# Altium PCB Для Сережи(autoroute.PcbDoc (part 1 of 2)
Units mm, origin at the board's own origin, x right, y up, seen from the top; angles counter-clockwise.
Board outline 53 x 45 mm, 4 copper layers (Top Layer, Layer 1, Layer 2, Bottom Layer), stack 1.083 mm thick; 122 components, 141 nets, 830 pads, 246 vias.
Unrouted connection lines stored in the file: 174.
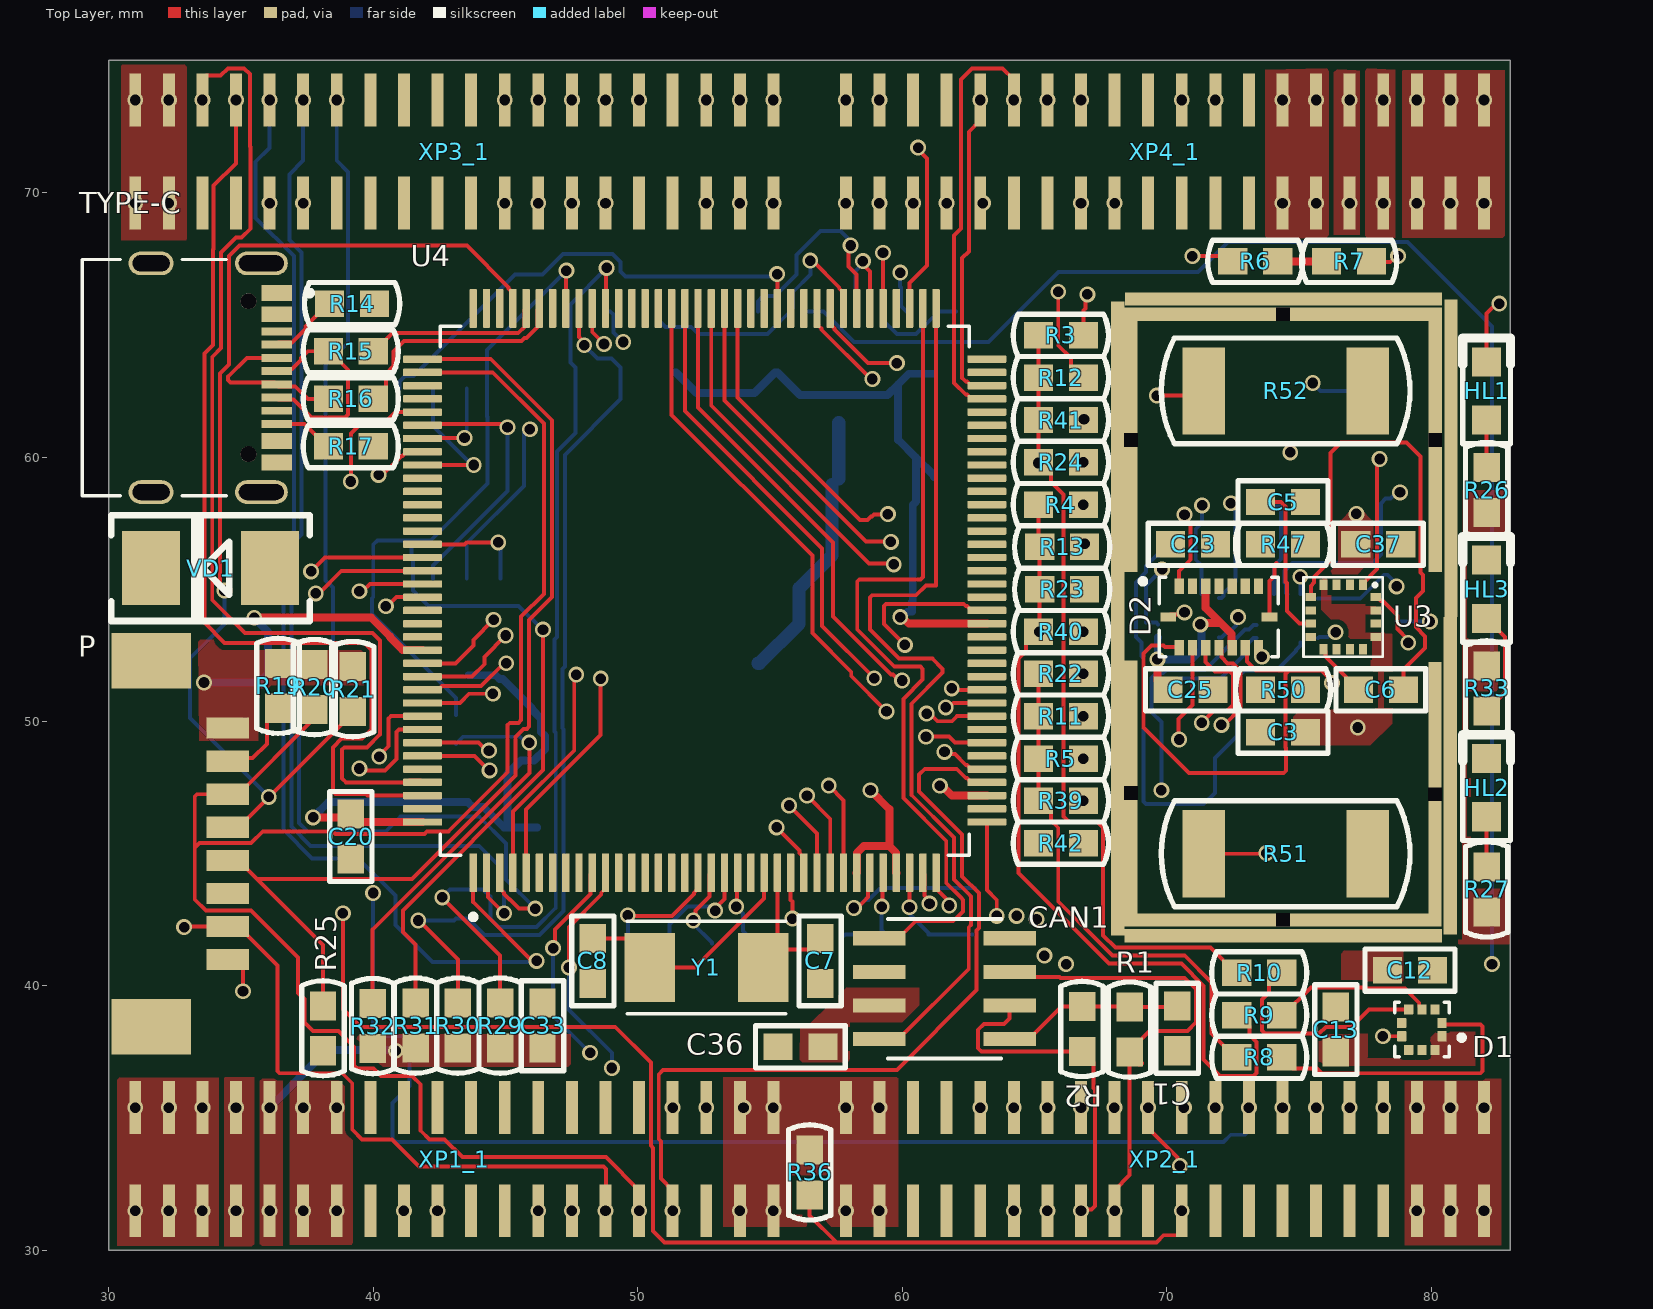
[diagram p0: Top Layer view]
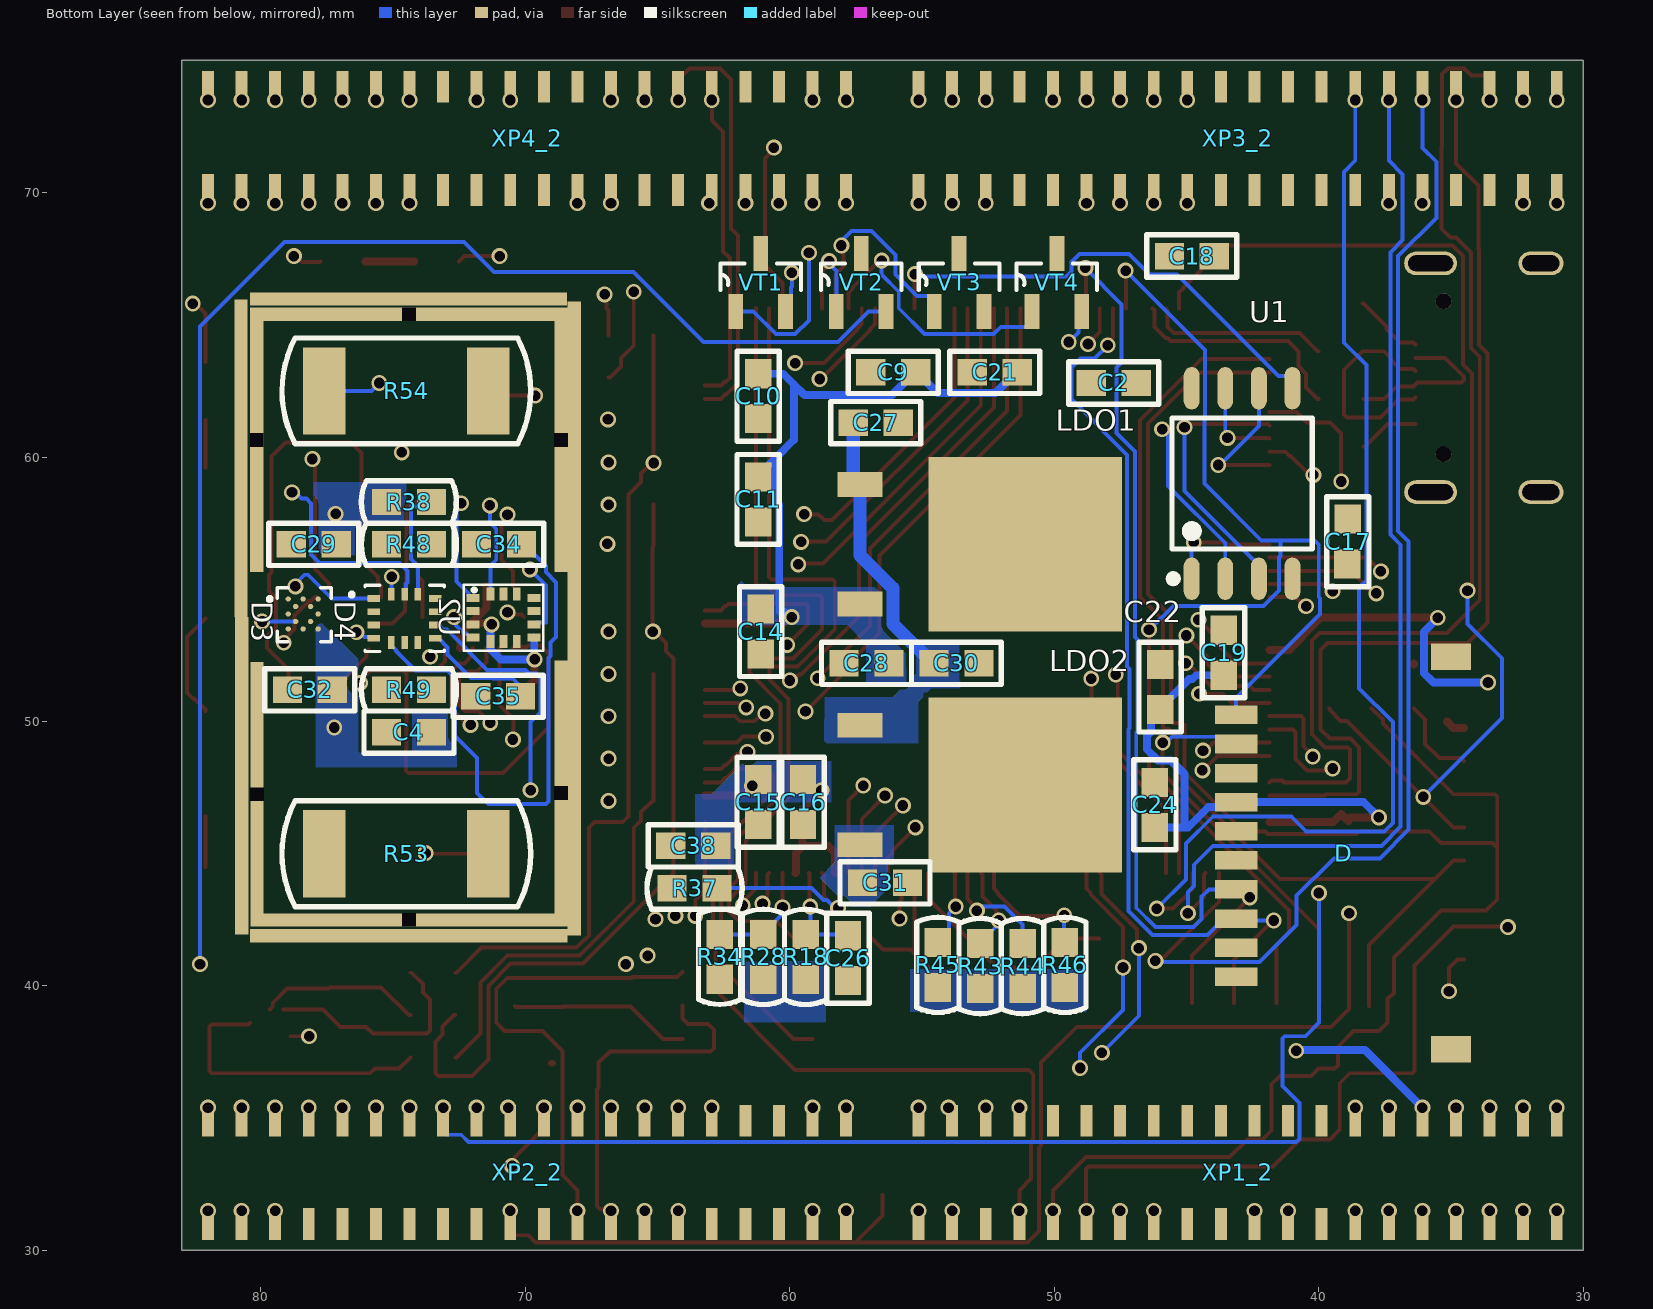
[diagram p1: Bottom Layer view, seen from below]
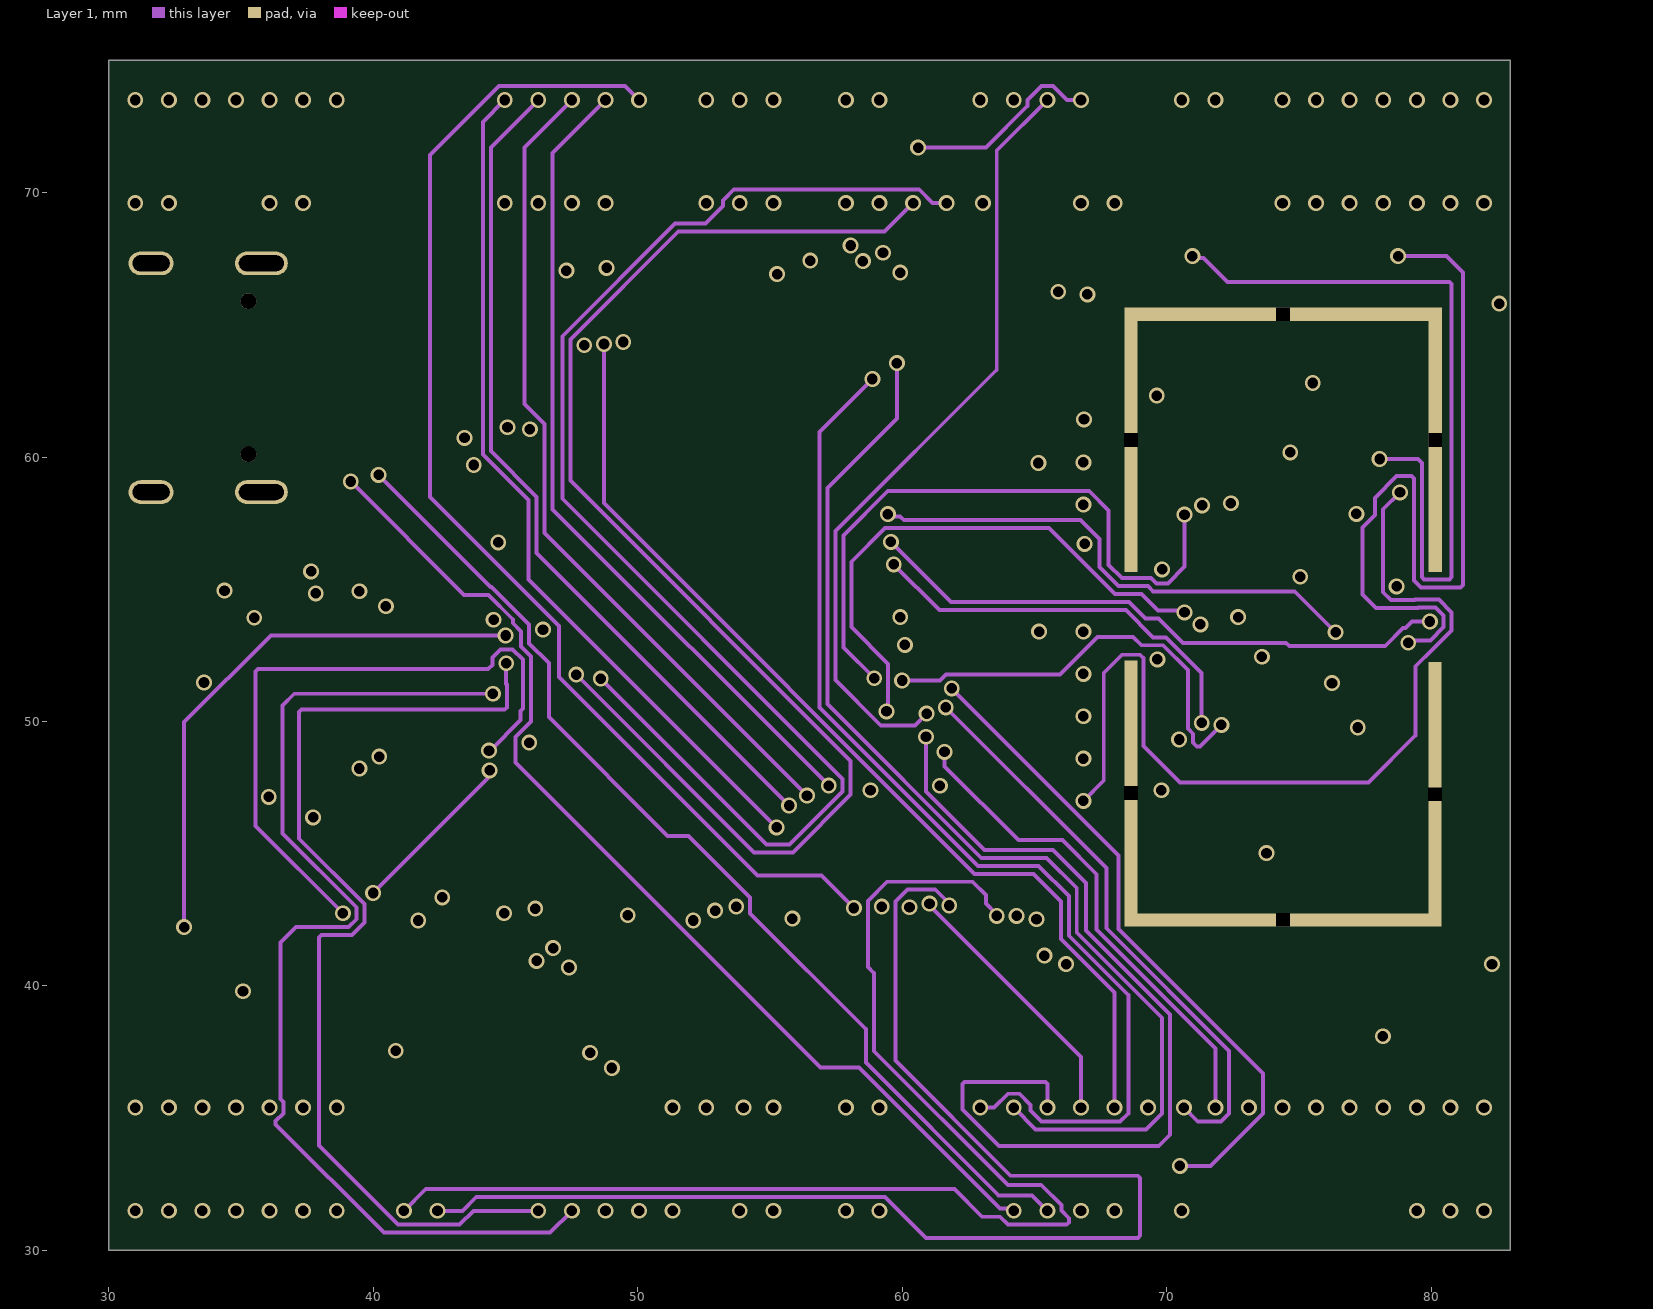
[diagram p2: Layer 1]
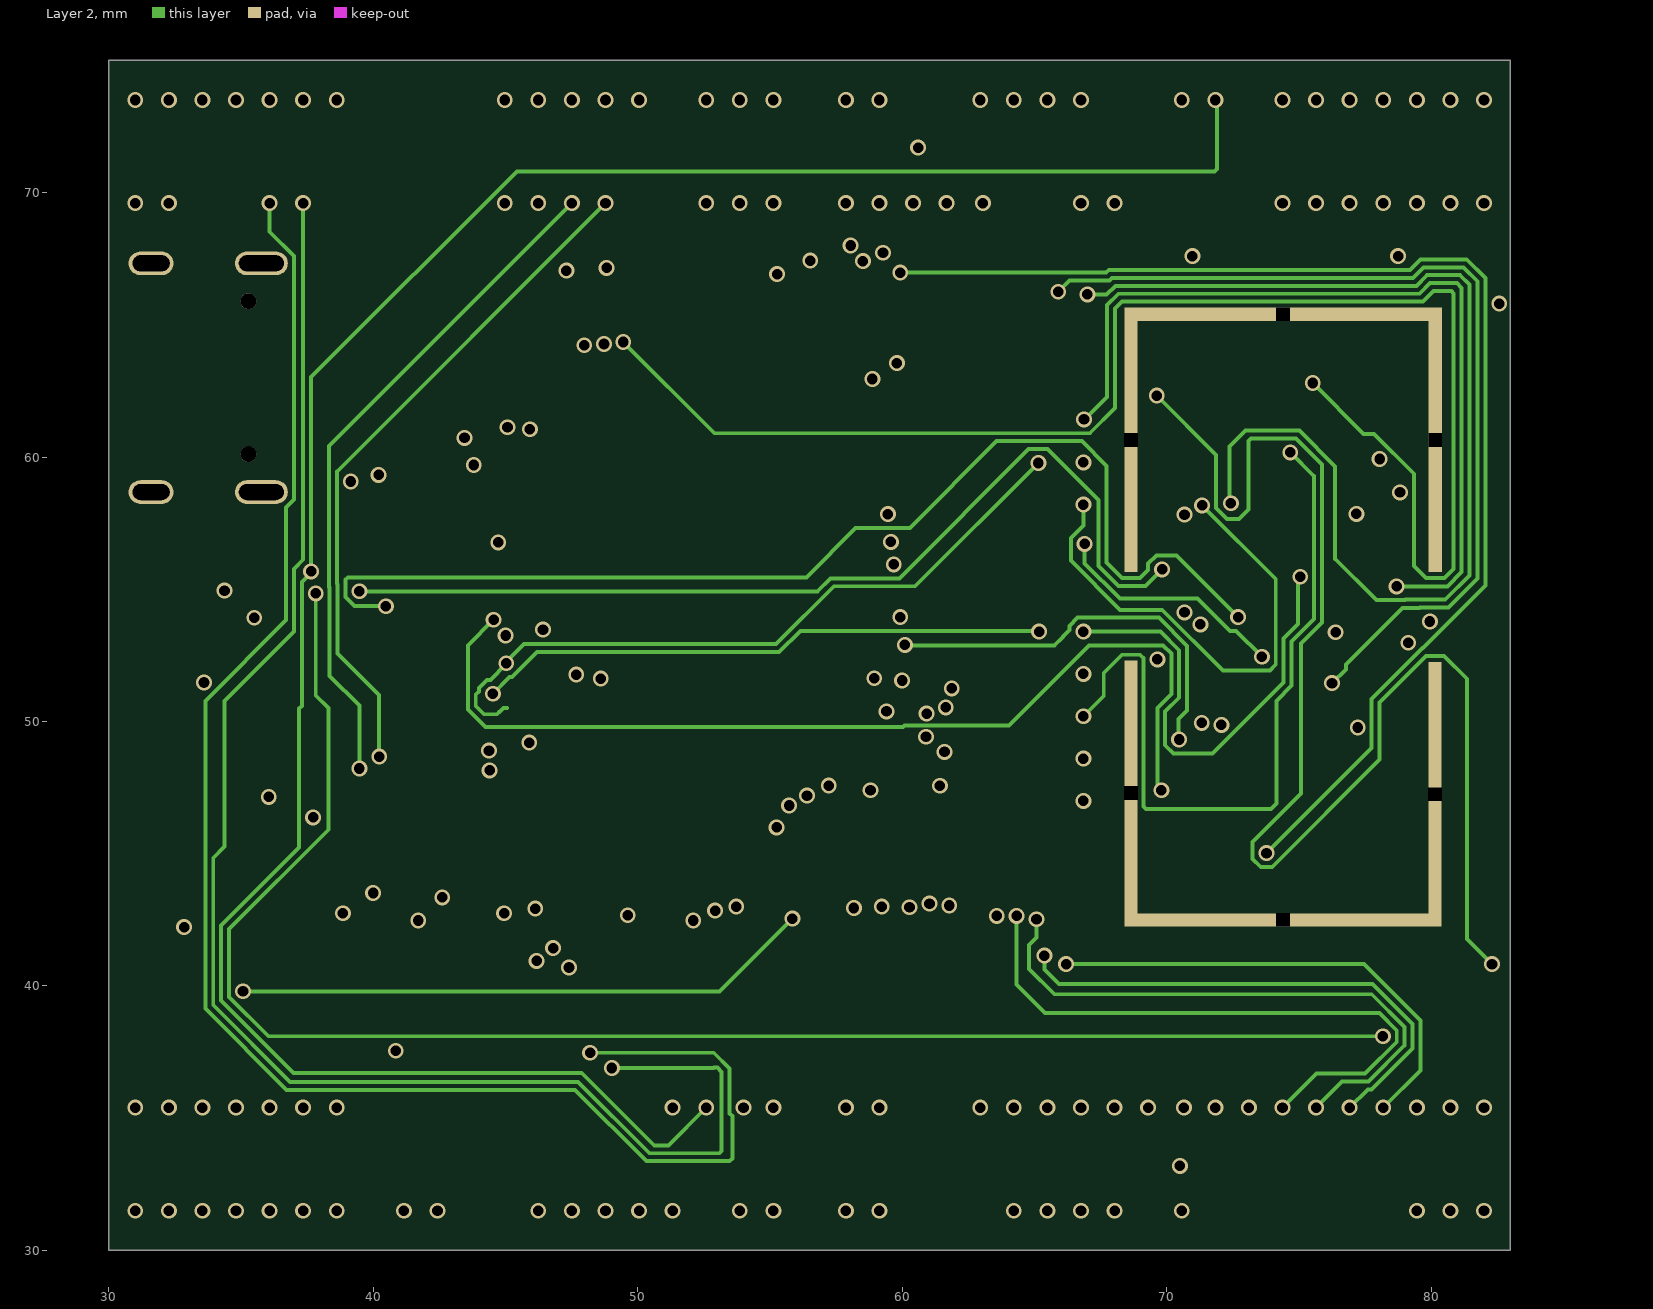
[diagram p3: Layer 2]
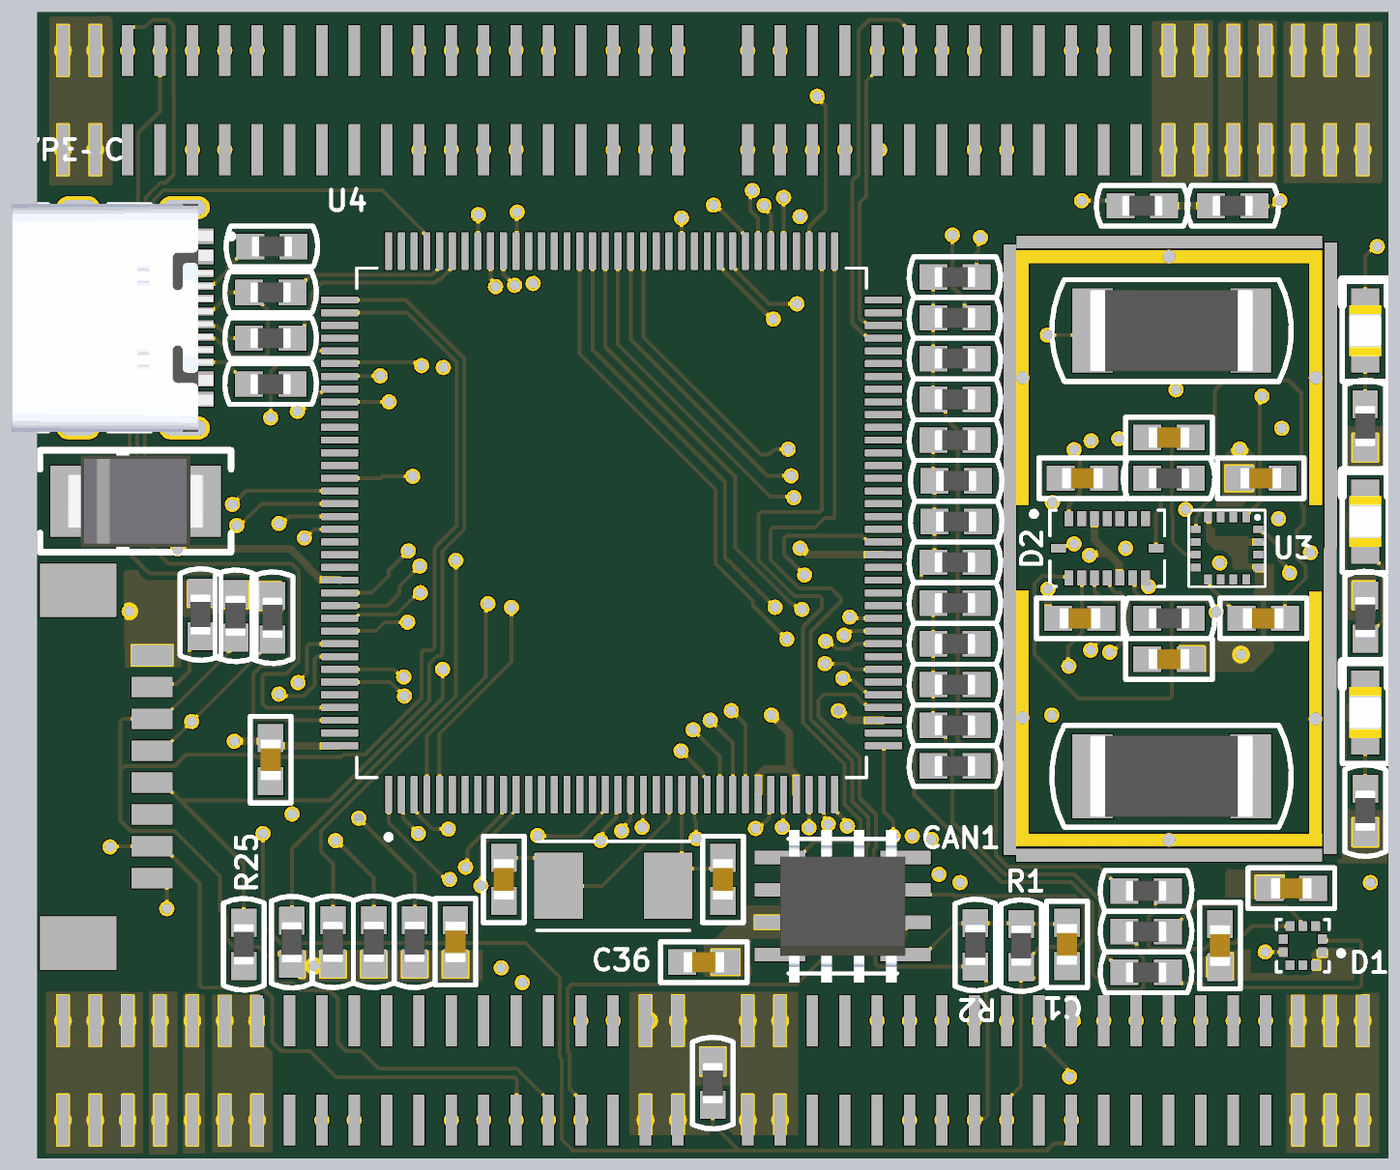
[diagram p5: 3D render of the assembled board from above, using the file's embedded part models]
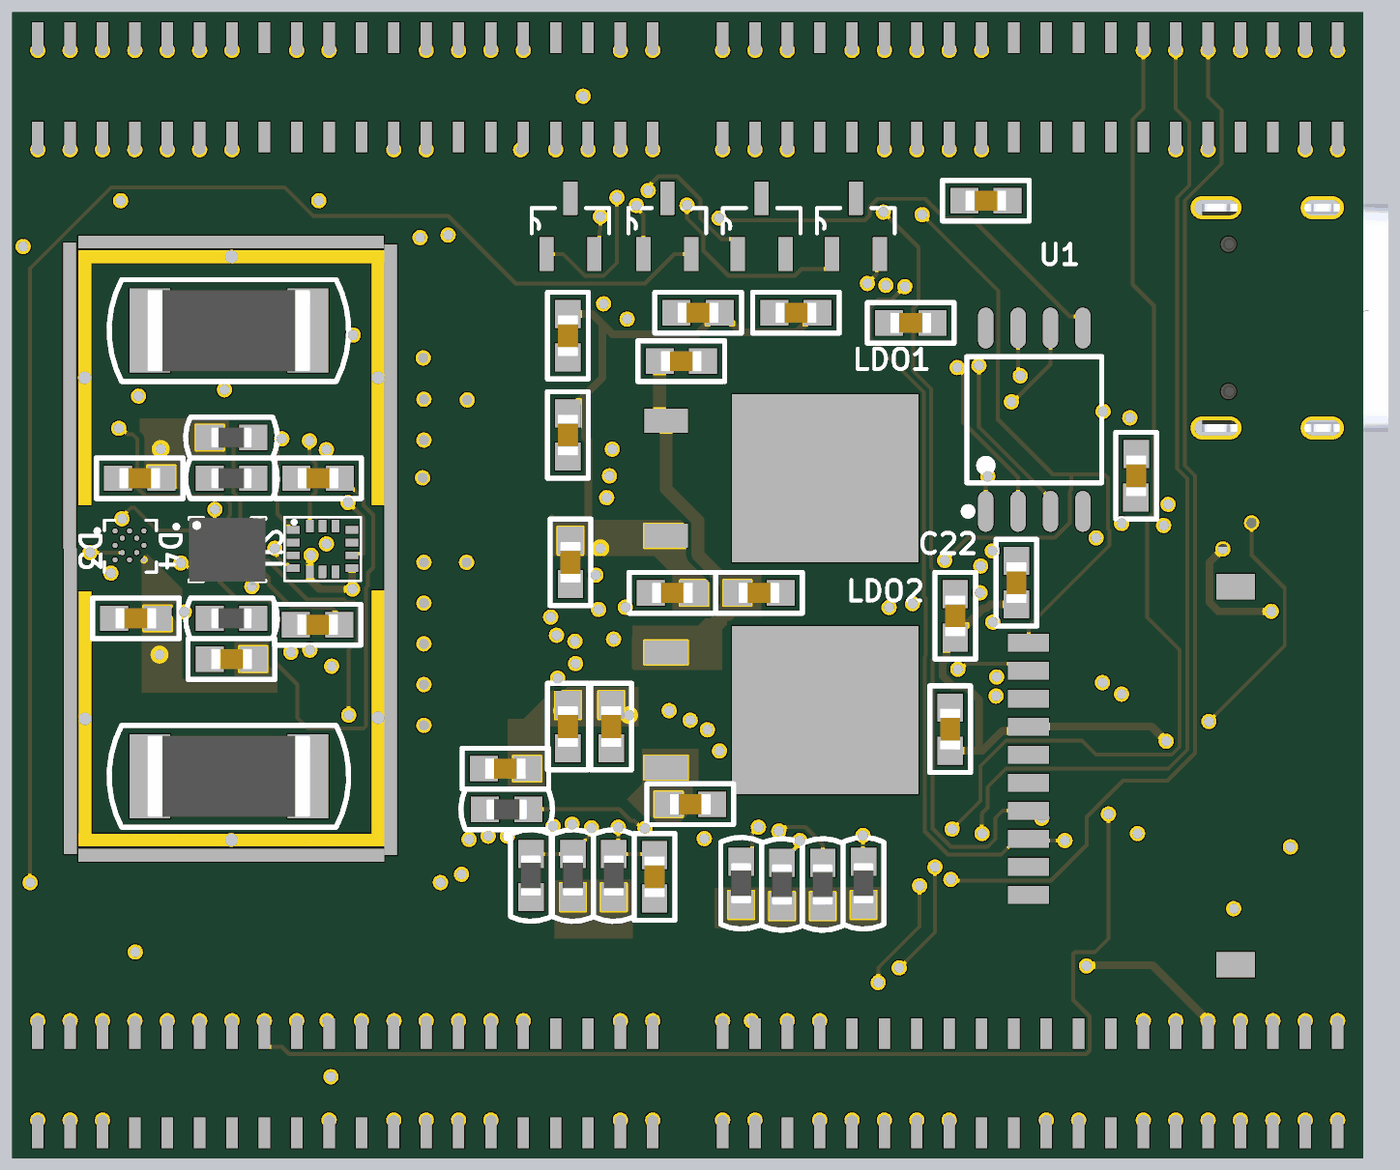
[diagram p6: 3D render of the assembled board from below, using the file's embedded part models]

## Layer stack, top to bottom
Top Solder: solder mask 0.0102, Solder Resist, Dk 3.5
Top Layer: signal copper 0.0356
Dielectric 2: prepreg 0.0711, PP-006, Dk 4.1
Layer 1: signal copper 0.035
Dielectric 1: core 0.8, FR4 Tg135, Dk 4.5
Layer 2: signal copper 0.035
Dielectric 3: prepreg 0.0711, PP-006, Dk 4.1
Bottom Layer: signal copper 0.0356
Bottom Solder: solder mask 0.0102, Solder Resist, Dk 3.5

## Board outline
30,30 83,30 83,75 30,75

## Design rules (kind name [scope] priority, off if disabled: settings)
Clearance [All] p1: gap=0.15 ignorepadtopadclearanceinfootprint=FALSE except(0.125: Arc-SMDPad Track-SMDPad SMDPad-SMDPad; 0.2: Arc-Poly Track-Poly SMDPad-Poly THPad-Poly Via-Poly Fill-Poly Poly-Poly)
ComponentClearance [All] p1: gap=0 collisioncheckmode=3 verticalgap=0 showdistances=FALSE
PolygonConnect [All] p1: connectstyle=Direct reliefconductorwidth=0.254 reliefentries=4 polygonreliefangle="90 Angle" airgapwidth=0.254
RoutingVias [All] p1: holewidth=0.4 width=0.6 viastyle="Through Hole" minholewidth=0.4 minwidth=0.6 maxholewidth=0.4 maxwidth=0.6
SolderMaskExpansion [All] p1: expansion=0.05 istentingtop=FALSE
Width Width_5 [InNet('3V3')] p1: maxlimit=0.3 minlimit=0.3 preferedwidth=0.3 minimp=50.000000 maximp=50.000000 favimp=50.000000
Width Width_4 [InNet('GND')] p2: maxlimit=0.5 minlimit=0.5 preferedwidth=0.5 minimp=50.000000 maximp=50.000000 favimp=50.000000
Width Width_3 [InNet('5V')] p3: maxlimit=0.5 minlimit=0.5 preferedwidth=0.5 minimp=50.000000 maximp=50.000000 favimp=50.000000
Width Width_2 [InNet('4V2')] p4: maxlimit=0.4 minlimit=0.4 preferedwidth=0.4 minimp=50.000000 maximp=50.000000 favimp=50.000000
Width Width_1 [InNet('3V3_SEN')] p5: maxlimit=0.3 minlimit=0.3 preferedwidth=0.3 minimp=50.000000 maximp=50.000000 favimp=50.000000
Width [All] p6: maxlimit=0.15 minlimit=0.125 preferedwidth=0.15 minimp=50.000000 maximp=50.000000 favimp=50.000000
29 further rules are at their usual default settings.

## Components (designator, comment, footprint, x,y, rotation, side; value= is the part's Value field where it differs from the comment)
C1 "47 nF" C0603#1 70.4,38.4 r90 top
C2 "100 nF" C0603#1 47.75,62.8 r180 bottom
C3 "100 nF" C0603#1 74.4,49.6 r0 top
C4 "100 nF" C0603#1 74.4,49.6 r180 bottom
C5 "4.7 uF" C0603#1 74.4,58.3 r180 top
C6 "0.22 uF" C0603#1 78.1,51.2 r180 top
C7 "22 pF" C0603#1 56.9,40.95 r90 top
C8 "22 pF" C0603#1 48.3,40.95 r90 top
C9 "100 nF" C0603#1 56.088,63.2 r180 bottom
C10 "100 nF" C0603#1 61.2,62.3 r90 bottom
C11 "100 nF" C0603#1 61.2,58.4 r90 bottom
C12 "100 nF" C0603#1 79.2,40.6 r180 top
C13 "100 nF" C0603#1 76.4,38.35 r270 top
C14 "100 nF" C0603#1 61.1,53.4 r90 bottom
C15 "100 nF" C0603#1 61.2,46.95 r90 bottom
C16 "100 nF" C0603#1 59.5,46.95 r90 bottom
C17 "100 nF" C0603#2 38.9,56.8 r90 bottom
C18 "100 nF" C0603#1 44.8,67.6 r180 bottom
C19 "100 nF" C0603#1 43.6,52.6 r270 bottom
C20 "100 nF" C0603#1 39.15,45.65 r90 top
C21 "100 nF" C0603#1 52.25,63.2 r180 bottom
C22 "100 nF" C0603#1 46,51.3 r270 bottom
C23 "100 nF" C0603#1 71,56.7 r180 top
C24 "100 nF" C0603#1 46.2,46.85 r270 bottom
C25 "100 nF" C0603#1 70.9,51.2 r180 top
C26 "100 nF" C0603#1 57.8,41.05 r90 bottom
C27 "0.1 uF" C0603#1 56.75,61.3 r0 bottom
C28 "10 uF" C0603#1 57.1,52.2 r180 bottom
C29 "100 nF" C0603#1 78,56.7 r180 bottom
C30 "0.1 uF" C0603#1 53.7,52.2 r0 bottom
C31 "10 uF" C0603#1 56.4,43.9 r0 bottom
C32 "100 nF" C0603#1 78.15,51.2 r180 bottom
C33 "0.1 uF" C0603#1 46.4,38.5 r270 top
C34 "100 nF" C0603#1 71,56.7 r180 bottom
C35 "100 nF" C0603#1 71.025,50.95 r180 bottom
C36 "100 nF" C0603#1 56.15,37.7 r180 top
C37 "100 nF" C0603#1 78,56.7 r180 top
C38 "100 nF" C0603#1 63.65,45.3 r180 bottom
CAN1 "TJA1040T" SO-8_S 61.6,39.9 r0 top
D "D" GTFP08131Y2HR 35.8,45.4 r270 bottom locked
D1 "BMP388" PQFN50P200X200X80-10N 79.65,38.35 r180 top
D2 "BMI088" PQFN50P450X300X100-16N 71.975,53.95 r0 top
D3 "BMM150" XDCR_BMM150 78.365,54.031 r180 bottom
D4 "BMI270" XDCR_BMI270 74.563,53.9 r180 bottom
HL1 "" LD0805 82.1,62.5 r90 top
HL2 "" LD0805 82.1,47.5 r90 top
HL3 "" LD0805 82.1,55 r90 top
LDO1 "КФ1158Н" TO228P972X240-3N 51.252,56.7 r270 bottom
LDO2 "КФ1158Н" TO228P972X240-3N 51.252,47.6 r270 bottom
P "Header 1x8" "PicoBlade 8pin" 34.5,45.385 r270 top
R1 "60Om" R0603 68.6,38.35 r90 top
R2 "60 Om" R0603 66.8,38.375 r90 top
R3 "0" R0603 66,64.6 r180 top
R4 "0" R0603 66,58.2 r180 top
R5 "0" R0603 66,48.6 r180 top
R6 "2.2k" R0603 73.35,67.4 r0 top
R7 "2.2k" R0603 76.9,67.4 r180 top
R8 "0" R0603 73.5,37.3 r0 top
R9 "0" R0603 73.5,38.9 r0 top
R10 "0" R0603 73.5,40.5 r0 top
R11 "0" R0603 66,50.2 r0 top
R12 "0" R0603 66,63 r180 top
R13 "0" R0603 66.05,56.6 r0 top
R14 "5,1 кОм" R0603 39.2,65.8 r180 top
R15 "68" R0603 39.15,64 r0 top
R16 "68" R0603 39.15,62.2 r0 top
R17 "5,1 кОм" R0603 39.15,60.4 r0 top
R18 "47 Ом" R0603 59.4,41.1 r90 bottom
R19 "47 кОм" R0603 36.4,51.35 r90 top
R20 "47 кОм" R0603 37.775,51.3 r90 top
R21 "47 кОм" R0603 39.225,51.225 r90 top
R22 "0" R0603 66,51.8 r0 top
R23 "0" R0603 66.05,55 r0 top
R24 "0" R0603 66,59.8 r180 top
R25 "47 кОм" R0603 38.1,38.4 r270 top
R26 "220" R0603 82.1,58.75 r270 top
R27 "220" R0603 82.1,43.65 r270 top
R28 "0" R0603 61,41.1 r270 bottom
R29 "47 кОм" R0603 44.8,38.5 r90 top
R30 "47 кОм" R0603 43.2,38.5 r90 top
R31 "47 кОм" R0603 41.6,38.5 r90 top
R32 "47 кОм" R0603 39.98,38.484 r90 top
R33 "220" R0603 82.1,51.25 r90 top
R34 "0" R0603 62.65,41.103 r90 bottom
R36 "10 kOm" R0603 56.5,32.95 r90 top
R37 "0" R0603 63.6,43.7 r0 bottom
R38 "10 кОм" R0603 74.4,58.3 r0 bottom
R39 "0" R0603 66,47 r0 top
R40 "0" R0603 66,53.4 r0 top
R41 "0" R0603 66,61.4 r0 top
R42 "0" R0603 66,45.4 r0 top
R43 "Resistor" R0603 52.8,40.75 r270 bottom
R44 "Resistor" R0603 51.2,40.75 r270 bottom
R45 "Resistor" R0603 54.4,40.8 r270 bottom
R46 "Resistor" R0603 49.6,40.8 r270 bottom
R47 "Resistor_0,25W" R0603 74.4,56.7 r180 top
R48 "Resistor_0,25W" R0603 74.4,56.7 r0 bottom
R49 "Resistor_0,25W" R0603 74.4,51.2 r0 bottom
R50 "Resistor_0,25W" R0603 74.4,51.2 r0 top
R51 "Resistor_0,25W" R2512 74.5,45 r0 top
R52 "Resistor_0,25W" R2512 74.5,62.5 r0 top
R53 "Resistor_0,25W" R2512 74.5,45 r0 bottom
R54 "Resistor_0,25W" R2512 74.5,62.5 r180 bottom
TYPE-C "TYPE-C-31-M-12" HRO_TYPE-C-31-M-12 31.6,63 r270 top
U1 "W25Q128FVSIG" SOIC127P790X216-8N 42.9,59 r90 bottom
U2 "QMI8658" QMI8658 70.9,53.875 r0 bottom
U3 "QMC5883L" QMC5883L 76.675,54.025 r0 top
U4 "K1921BK01T2" QFP50P2200X2200X160-144N 52.53,54.95 r90 top
VD1 "" DO-214AA 33.85,55.8 r180 top
VT1 "MOSFET-N" SOT95P240X112-3N 61.1,66.6 r90 bottom
VT2 "MOSFET-N" SOT95P240X112-3N 57.3,66.6 r90 bottom
VT3 "MOSFET-N" SOT95P240X112-3N 53.6,66.6 r90 bottom
VT4 "MOSFET-N" SOT95P240X112-3N 49.9,66.6 r90 bottom
XP1_1 "PLLD-1.27-40S" "Headr 2x20 male" 42.851,33.447 r90 top
XP1_2 "PLLD-1.27-40S" "Headr 2x20 Female" 41.962,32.82 r90 bottom
XP2_1 "PLLD-1.27-40S" "Headr 2x20 male" 70.149,33.453 r270 top
XP2_2 "PLLD-1.27-40S" "Headr 2x20 Female" 71.038,33.08 r270 bottom
XP3_1 "PLLD-1.27-40S" "Headr 2x20 male" 42.851,71.547 r90 top
XP3_2 "PLLD-1.27-40S" "Headr 2x20 Female" 41.962,71.92 r90 bottom
XP4_1 "PLLD-1.27-40S" "Headr 2x20 male" 69.721,71.547 r90 top
XP4_2 "PLLD-1.27-40S" "Headr 2x20 Female" 68.832,71.92 r90 bottom
Y1 "8 мгц" XTAL_ABM7-8.000MHZ-8-R80-D2Y-T 52.6,40.7 r0 top

## Footprints (in the part's own frame and the unit in brackets; to place one, negate y for a bottom-side part, rotate by r counter-clockwise, add the part's x,y. Pads: shape width x height; smd on the part's side, far side on the other; paste and mask are expansions set on the pad)
C0603#1 [mm] "1608M"
  rect 1.1x1 smd: 1(-0.85,0) 2(0.85,0)
  silkscreen extent -1.7,-0.8 1.7,0.8, body extent -0.8,-0.4 0.8,0.4, height 0.91
C0603#2 [mm] "1608M"
  rect 1.1x1 smd: 1(-0.85,0.018) 2(0.85,0)
  silkscreen extent -1.7,-0.8 1.7,0.8, body extent -0.8,-0.4 0.8,0.4, height 0.91
DO-214AA [mm] "(SMB) Low profile package"
  rect 2.2x2.8 smd: 1(-2.25,0) 2(2.25,0)
  silkscreen extent -3.75,-2 3.75,2, body extent -2.7,-1.8 2.7,1.8, height 2.3
GTFP08131Y2HR [mm]
  rect 0.7x1.6 smd: 1(-4.85,-7.325) 2(-3.75,-7.325) 3(-2.65,-7.325) 4(-1.55,-7.325) 5(-0.45,-7.325) 6(0.65,-7.325) 7(1.75,-7.325) 8(2.85,-7.325) 9(3.95,-7.325) CD(5.05,-7.325)
  rect 1x1.5 smd: S1(-7.05,0.8) S2(7.8,0.8)
"Headr 2x20 Female" [mm]
  rect 1.2x0.45 smd: 1(-1.82,-10.962) 2(2.08,-10.962) 3(-1.82,-9.692) 4(2.08,-9.692) 5(-1.82,-8.422) 6(2.08,-8.422) 7(-1.82,-7.152) 8(2.08,-7.152) 9(-1.82,-5.882) 10(2.08,-5.882) 11(-1.82,-4.612) 12(2.08,-4.612) 13(-1.82,-3.342) 14(2.08,-3.342) 15(-1.82,-2.072) 16(2.08,-2.072) 17(-1.82,-0.802) 18(2.08,-0.802) 19(-1.82,0.468) 20(2.08,0.468) 21(-1.82,1.738) 22(2.08,1.738) 23(-1.82,3.008) 24(2.08,3.008) 25(-1.82,4.278) 26(2.08,4.278) 27(-1.82,5.548) 28(2.08,5.548) 29(-1.82,6.818) 30(2.08,6.818) 31(-1.82,8.088) 32(2.08,8.088) 33(-1.82,9.358) 34(2.08,9.358) 35(-1.82,10.628) 36(2.08,10.628) 37(-1.82,11.898) 38(2.08,11.898) 39(-1.82,13.168) 40(2.08,13.168)
"Headr 2x20 male" [mm]
  rect 2x0.45 smd: 1(-1.947,11.851) 2(1.953,11.851) 3(-1.947,10.581) 4(1.953,10.581) 5(-1.947,9.311) 6(1.953,9.311) 7(-1.947,8.041) 8(1.953,8.041) 9(-1.947,6.771) 10(1.953,6.771) 11(-1.947,5.501) 12(1.953,5.501) 13(-1.947,4.231) 14(1.953,4.231) 15(-1.947,2.961) 16(1.953,2.961) 17(-1.947,1.691) 18(1.953,1.691) 19(-1.947,0.421) 20(1.953,0.421) 21(-1.947,-0.849) 22(1.953,-0.849) 23(-1.947,-2.119) 24(1.953,-2.119) 25(-1.947,-3.389) 26(1.953,-3.389) 27(-1.947,-4.659) 28(1.953,-4.659) 29(-1.947,-5.929) 30(1.953,-5.929) 31(-1.947,-7.199) 32(1.953,-7.199) 33(-1.947,-8.469) 34(1.953,-8.469) 35(-1.947,-9.739) 36(1.953,-9.739) 37(-1.947,-11.009) 38(1.953,-11.009) 39(-1.947,-12.279) 40(1.953,-12.279)
HRO_TYPE-C-31-M-12 [mm]
  rect 0.6x1.14 smd mask+0.05: A1_B12(-3.2,4.75) A4_B9(-2.4,4.75) B1_A12(3.2,4.75) B4_A9(2.4,4.75)
  rect 0.3x1.14 smd mask+0.05: A5(-1.25,4.75) A6(-0.25,4.75) A7(0.25,4.75) A8(1.25,4.75) B5(1.75,4.75) B6(0.75,4.75) B7(-0.75,4.75) B8(-1.75,4.75)
  oval 0.9x2 hole 0.6 slot 1.7 at 90 deg: S1(-4.325,4.17) S2(4.325,4.17)
  oval 0.9x1.7 hole 0.6 slot 1.4 at 90 deg: S3(-4.325,0) S4(4.325,0)
  round 0.6 hole 0.6 unplated: ""(-2.89,3.68) ""(2.89,3.68)
  silkscreen extent -4.47,-2.6 4.47,6.1, body extent -4.47,-2.6 4.47,5.31, height 3.31
LD0805 [mm]
  rect 1.1x1.1 smd: 1(-1.1,0) 2(1.1,0)
  silkscreen extent -2,-0.9 2,0.9, body extent -1,-0.62 1,0.63, height 0.73
"PicoBlade 8pin" [mm]
  rect 0.8x1.6 smd: 1(-4.365,0) 2(-3.115,0) 3(-1.865,0) 4(-0.615,0) 5(0.635,0) 6(1.885,0) 7(3.135,0) 8(4.385,0)
  rect 2.1x3 smd: S(-6.915,-2.9) S(6.935,-2.9)
PQFN50P200X200X80-10N [mm]
  rrect9% 0.35x0.38 smd: 1(-0.765,0.25) 2(-0.765,-0.25) 3(-0.5,-0.765) 4(0,-0.765) 5(0.5,-0.765) 6(0.765,-0.25) 7(0.765,0.25) 8(0.5,0.765) 9(0,0.765) 10(-0.5,0.765)
  silkscreen extent -1.6,-1.03 1.03,1.03
PQFN50P450X300X100-16N [mm]
  rect 0.35x0.59 smd: 1(-1.5,1.165) 2(-1,1.165) 3(-0.5,1.165) 4(0,1.165) 5(0.5,1.165) 6(1,1.165) 7(1.5,1.165) 9(1.5,-1.165) 10(1,-1.165) 11(0.5,-1.165) 12(0,-1.165) 13(-0.5,-1.165) 14(-1,-1.165) 15(-1.5,-1.165)
  rect 0.59x0.35 smd: 8(1.915,0) 16(-1.915,0)
  silkscreen extent -2.97,-1.5 2.25,1.5
QFP50P2200X2200X160-144N [mm]
  rrect25% 1.47x0.28 smd: 1(-10.67,8.75) 2(-10.67,8.25) 3(-10.67,7.75) 4(-10.67,7.25) 5(-10.67,6.75) 6(-10.67,6.25) 7(-10.67,5.75) 8(-10.67,5.25) 9(-10.67,4.75) 10(-10.67,4.25) 11(-10.67,3.75) 12(-10.67,3.25) 13(-10.67,2.75) 14(-10.67,2.25) 15(-10.67,1.75) 16(-10.67,1.25) 17(-10.67,0.75) 18(-10.67,0.25) 19(-10.67,-0.25) 20(-10.67,-0.75) 21(-10.67,-1.25) 22(-10.67,-1.75) 23(-10.67,-2.25) 24(-10.67,-2.75) 25(-10.67,-3.25) 26(-10.67,-3.75) 27(-10.67,-4.25) 28(-10.67,-4.75) 29(-10.67,-5.25) 30(-10.67,-5.75) 31(-10.67,-6.25) 32(-10.67,-6.75) 33(-10.67,-7.25) 34(-10.67,-7.75) 35(-10.67,-8.25) 36(-10.67,-8.75) 73(10.67,-8.75) 74(10.67,-8.25) 75(10.67,-7.75) 76(10.67,-7.25) 77(10.67,-6.75) 78(10.67,-6.25) 79(10.67,-5.75) 80(10.67,-5.25) 81(10.67,-4.75) 82(10.67,-4.25) 83(10.67,-3.75) 84(10.67,-3.25) 85(10.67,-2.75) 86(10.67,-2.25) 87(10.67,-1.75) 88(10.67,-1.25) 89(10.67,-0.75) 90(10.67,-0.25) 91(10.67,0.25) 92(10.67,0.75) 93(10.67,1.25) 94(10.67,1.75) 95(10.67,2.25) 96(10.67,2.75) 97(10.67,3.25) 98(10.67,3.75) 99(10.67,4.25) 100(10.67,4.75) 101(10.67,5.25) 102(10.67,5.75) 103(10.67,6.25) 104(10.67,6.75) 105(10.67,7.25) 106(10.67,7.75) 107(10.67,8.25) 108(10.67,8.75)
  rrect25% 0.28x1.47 smd: 37(-8.75,-10.67) 38(-8.25,-10.67) 39(-7.75,-10.67) 40(-7.25,-10.67) 41(-6.75,-10.67) 42(-6.25,-10.67) 43(-5.75,-10.67) 44(-5.25,-10.67) 45(-4.75,-10.67) 46(-4.25,-10.67) 47(-3.75,-10.67) 48(-3.25,-10.67) 49(-2.75,-10.67) 50(-2.25,-10.67) 51(-1.75,-10.67) 52(-1.25,-10.67) 53(-0.75,-10.67) 54(-0.25,-10.67) 55(0.25,-10.67) 56(0.75,-10.67) 57(1.25,-10.67) 58(1.75,-10.67) 59(2.25,-10.67) 60(2.75,-10.67) 61(3.25,-10.67) 62(3.75,-10.67) 63(4.25,-10.67) 64(4.75,-10.67) 65(5.25,-10.67) 66(5.75,-10.67) 67(6.25,-10.67) 68(6.75,-10.67) 69(7.25,-10.67) 70(7.75,-10.67) 71(8.25,-10.67) 72(8.75,-10.67) 109(8.75,10.67) 110(8.25,10.67) 111(7.75,10.67) 112(7.25,10.67) 113(6.75,10.67) 114(6.25,10.67) 115(5.75,10.67) 116(5.25,10.67) 117(4.75,10.67) 118(4.25,10.67) 119(3.75,10.67) 120(3.25,10.67) 121(2.75,10.67) 122(2.25,10.67) 123(1.75,10.67) 124(1.25,10.67) 125(0.75,10.67) 126(0.25,10.67) 127(-0.25,10.67) 128(-0.75,10.67) 129(-1.25,10.67) 130(-1.75,10.67) 131(-2.25,10.67) 132(-2.75,10.67) 133(-3.25,10.67) 134(-3.75,10.67) 135(-4.25,10.67) 136(-4.75,10.67) 137(-5.25,10.67) 138(-5.75,10.67) 139(-6.25,10.67) 140(-6.75,10.67) 141(-7.25,10.67) 142(-7.75,10.67) 143(-8.25,10.67) 144(-8.75,10.67)
  silkscreen extent -12.44,-10 10,10
QMC5883L [mm]
  rect 0.4x0.3 smd: 1(1.225,0.675) 2(1.225,0.175) 3(1.225,-0.325) 4(1.225,-0.825) 9(-1.225,-0.825) 10(-1.225,-0.325) 11(-1.225,0.175) 12(-1.225,0.675)
  rect 0.3x0.4 smd: 5(0.75,-1.3) 6(0.25,-1.3) 7(-0.25,-1.3) 8(-0.75,-1.3) 13(-0.75,1.15) 14(-0.25,1.15) 15(0.25,1.15) 16(0.75,1.15)
  silkscreen extent -1.5,-1.58 1.5,1.42
QMI8658 [mm]
  rect 0.5x0.3 smd: 1(1.075,-0.8) 2(1.075,-0.3) 3(1.075,0.2) 4(1.075,0.7) 8(-1.225,0.7) 9(-1.225,0.2) 10(-1.225,-0.3) 11(-1.225,-0.8)
  rect 0.3x0.5 smd: 5(0.425,0.85) 6(-0.075,0.85) 7(-0.575,0.85) 12(-0.575,-0.95) 13(-0.075,-0.95) 14(0.425,-0.95)
  silkscreen extent -1.57,-1.3 1.43,1.2
R0603 [mm] "1608M"
  rect 1.1x1 smd: 1(-0.85,0) 2(0.85,0)
  silkscreen extent -1.8,-0.8 1.8,0.8, body extent -0.8,-0.4 0.8,0.4, height 0.38
R2512 [mm] "6432M"
  rect 1.6x3.3 smd: 1(-3.1,0) 2(3.1,0)
  silkscreen extent -4.7,-2 4.7,2, body extent -3.2,-1.6 3.2,1.6, height 0.7
SO-8_S [mil]
  rect 78x21 smd: 1(-97,75) 2(-97,25) 3(-97,-25) 4(-97,-75) 5(97,-75) 6(97,-25) 7(97,25) 8(97,75)
  silkscreen extent -84,-104 84,104, body extent -96,-118 96,118, height 69
SOIC127P790X216-8N [mm]
  oval 1.6x0.6 smd: 1(-3.6,1.905) 2(-3.6,0.635) 3(-3.6,-0.635) 4(-3.6,-1.905) 5(3.6,-1.905) 6(3.6,-0.635) 7(3.6,0.635) 8(3.6,1.905)
  silkscreen extent -3.82,-2.65 2.48,2.82
SOT95P240X112-3N [mil]
  rect 52x22 smd: 1(-43,37) 2(-43,-37) 3(43,0)
  silkscreen extent -11,-60 28,60
TO228P972X240-3N [mil]
  rect 37x67 smd: 1(-89,-240) 3(89,-240)
  rect 260x288 smd: 2(0,6)
XDCR_BMI270 [mm]
  rect 0.475x0.25 smd: 1(-1.163,0.75) 2(-1.163,0.25) 3(-1.163,-0.25) 4(-1.163,-0.75) 8(1.162,-0.75) 9(1.162,-0.25) 10(1.162,0.25) 11(1.162,0.75)
  rect 0.25x0.475 smd: 5(-0.5,-0.913) 6(0,-0.913) 7(0.5,-0.913) 12(0.5,0.912) 13(0,0.912) 14(-0.5,0.912)
  silkscreen extent -2.08,-1.25 1.5,1.25, body extent -1.5,-1.25 1.5,1.25, height 0.87
XDCR_BMM150 [mm]
  round 0.2 smd: A1(-0.601,0.601) A3(-0.035,0.601) A5(0.531,0.601) B2(-0.318,0.318) B4(0.248,0.318) C1(-0.601,0.035) C5(0.531,0.035) D2(-0.318,-0.248) D4(0.248,-0.248) E1(-0.601,-0.531) E3(-0.035,-0.531) E5(0.531,-0.531)
  silkscreen extent -1.38,-1.02 1.02,1.02
XTAL_ABM7-8.000MHZ-8-R80-D2Y-T [mm]
  rect 1.9x2.6 smd: 1(-2.15,0) 2(2.15,0)
  silkscreen extent -3,-1.75 3,1.75

## Part data
C1 C2 C3 C4 C5 C6 C7 C8 C9 C10 C11 C12 C13 C14 C15 C16 C17 C18 C19 C20 C21 C22 C23 C24 C25 C26 C27 C28 C29 C30 C31 C32 C33 C34 C35 C36 C37 C38: library part Capacitor, Published=18.05.2010, Publisher="Andrew Danich", Type=Конденсатор
D: library part GTFP08131Y2HR
HL1 HL2 HL3: library part Led-1, Published=03.12.2013, Publisher="Andrew Danich", Type="Индикатор единичный"
R1 R2 R3 R4 R5 R6 R7 R8 R9 R10 R11 R12 R13 R14 R15 R16 R17 R18 R19 R20 R21 R22 R23 R24 R25 R26 R27 R28 R29 R30 R31 R32 R33 R34 R36 R37 R38 R39 R40 R41 R42: library part Resistor, Published=24.03.2010, Publisher="Andrew Danich", Type=Резистор
VD1: library part Schottky
Y1: library part ABM7-8.000MHZ-8-R80-D2Y-T, "Crystal 22.1184MHz Ã‚Â±20ppm (Tol) Ã‚Â±30ppm (Stability) 18pF FUND 50Ohm 2-Pin Mini-CSMD T/R", Package=None, Availability=Unavailable, MP=ABM7-8.000MHZ-8-R80-D2Y-T, Price=None
R43 R44 R45 R46: Published=24.03.2010, Publisher="Andrew Danich", Type=Резистор
R47 R48 R49 R50 R51 R52 R53 R54: Published=19.09.2014, Publisher="Andrew Danich", Type=Резистор
VT1 VT2 VT3 VT4: Published=24.09.2010, Publisher="Andrew Danich", Type=Транзистор

## Free pads (board coordinates)
  rect 0.5x12 smd: 17(68.15,47.9) 17(68.152,59.882) 17(80.723,47.943) 17(80.75,59.95)
  rect 0.5x12 smd far side: 17(68.15,47.9) 17(68.152,59.882) 17(80.723,47.943) 17(80.75,59.95)
  rect 0.5x10 hole 0.5 square: 17(68.65,47.3) 17(68.654,60.646) 17(80.146,47.254) 17(80.154,60.646)
  rect 12x0.5 hole 0.5 square: 17(74.4,42.5) 17(74.4,65.4)
  rect 12x0.5 smd: 17(74.407,41.898) 17(74.418,65.977)
  rect 12x0.5 smd far side: 17(74.407,41.898) 17(74.418,65.977)

## Via types
v1: diameter 0.6, hole 0.4, Top Layer to Bottom Layer, 246 vias

## Nets (pads, with @x,y where several pads share a name; then routed paths per layer and width w, separated by ;. In a path a pad name is that pad's centre, name@x,y a point inside that pad or via, vN(x,y) a via of type N, cw(c..) or ccw(c..) an arc to the next point about the centre after c; other vN are vias at no path point)
3V3: C2.2 C9.2 C10.2 C11.2 C14.2 C15.2 C16.2 C17.2 C18.2 C19.2 C20.2 C21.2 C22.2 C24.2 C28.2 C33.2 C38.2 D.4 LDO1.3 P.1 R18.1 R19.2 R20.2 R21.2 R26.2 R27.2 R28.2 R29.1 R30.1 R31.1 R32.1 R33.2 R43.2 R44.2 R45.2 R46.2 U1.8 U4.6 U4.17 U4.30 U4.33 U4.39 U4.52 U4.62 U4.72 U4.84 U4.95 U4.108 U4.121 U4.131 U4.144 XP1_1.9 XP1_1.10 XP1_2.9 XP1_2.10 XP4_1.31 XP4_1.32 XP4_2.31 XP4_2.32 | length 72.8
  Top Layer w0.3: P.1@34.5,49.75 34.9,49.75 P.1@35.15,50 ; v1(35.5,53.925) 39.925,53.925 40.625,53.225 40.625,53.192 41.107,52.71 41.85,52.71 U4.131@41.86,52.7 ; R19.2@36.4,52.15 R19.2@36.4,52.2 ; v1(37.725,46.375) 38.8,46.375 38.879,46.296 38.879,46.229 C20.2@39.15,46.5 39.45,46.2 U4.144@41.86,46.2 ; U4.30@58.28,44.28 58.29,44.29 58.29,45.033 58.547,45.29 59.513,45.29 ; v1(58.8,47.4) 59.513,46.687 59.513,45.29 ; U4.33@59.78,44.28 59.77,44.29 59.77,45.033 59.513,45.29 ; v1@60,53.95 60.25,53.7 U4.52@63.2,53.7 ; v1(61.425,47.572) 61.506,47.572 61.878,47.2 U4.39@63.2,47.2
  Bottom Layer w0.3: v1(33.6,51.475) 35.664,51.475 36.025,51.836 36.025,53.389 35.5,53.914 v1(35.5,53.925) ; v1(36.08,35.4) 38.255,37.575 40.825,37.575 v1(40.85,37.55) ; v1(37.725,46.375) 38.3,46.95 43.575,46.95 43.75,46.775 44.163,46.775 44.938,46 45.075,46 ; C19.2@43.6,51.75 44.632,51.75 44.779,51.603 44.897,51.603 46,50.5 C22.2@46,50.45 46.35,50.1 46.35,49.599 46.5,49.449 46.5,48.951 46.074,48.525 45.586,48.525 45.075,48.014 45.075,46 ; C24.2@46.2,46 45.075,46 ; C21.2@51.4,63.2 51.45,63.2 52.225,62.425 54.413,62.425 55.188,63.2 C9.2@55.238,63.2 55.288,63.2 56.138,62.35 59.449,62.35 59.849,62.75 ; v1(59.925,53.95) 60.006,53.95 60.206,54.15 60.375,54.15 60.375,54.525 60.4,54.55 60.4,58.189 60.524,58.313 60.524,59.976 ; C11.2@61.2,59.25 61.2,59.3 60.524,59.976 ; C10.2@61.2,63.15 60.249,63.15 59.849,62.75 ; 59.849,62.75 59.849,60.651 60.524,59.976
  other v1: 36.08,31.5 76.92,69.6 76.92,73.5
3V3_SEN: C3.2 C4.2 C12.2 C13.2 C23.2 C25.2 C29.2 C31.2 C32.2 C37.2 D1.1 D1.10 D2.3 D2.11 D3.B2 D3.E5 LDO2.3 R6.2 R7.2 R38.2 R42.2 U2.5 U2.8 U3.2 U3.4 U3.13 | length 10.4
  Top Layer w0.3: v1(69.65,52.35) 69.65,51.55 70,51.2 C25.2@70.05,51.2 ; v1(71.275,53.675) 71.332,53.732 72.035,53.732 ; D2.3@71.475,55.115 71.475,54.292 72.035,53.732 ; D2.11@72.475,52.785 72.45,52.81 72.45,53.317 72.035,53.732 ; R6.2@74.2,67.4 R7.2@76.05,67.4
  Bottom Layer w0.3: U2.8@69.675,53.175 69.662,53.175 69.662,52.362 v1(69.65,52.35) 70.939,52.35 71.325,52.736 U2.5@71.325,53.025 71.325,53.625 v1(71.275,53.675)
  other v1: 77.225,49.775 77.175,57.85
4V2: XP1_1.11 XP1_1.12 XP1_1.13 XP1_1.14 XP1_2.11 XP1_2.12 XP1_2.13 XP1_2.14 XP4_1.27 XP4_1.28 XP4_1.29 XP4_1.30 XP4_2.27 XP4_2.28 XP4_2.29 XP4_2.30
  other v1: 37.35,31.5 38.62,31.5 37.35,35.4 38.62,35.4 74.38,69.6 75.65,69.6 74.38,73.5 75.65,73.5
5V: C27.2 C30.2 C36.1 CAN1.3 LDO1.1 LDO2.1 XP1_1.7 XP1_1.8 XP1_2.7 XP1_2.8 XP4_1.33 XP4_1.34 XP4_2.33 XP4_2.34 | length 10.1
  Bottom Layer w0.5: C30.2@54.55,52.2 54.6,52.2 56.099,53.699 56.099,55.041 57.348,56.291 LDO1.1@57.348,58.961 ; LDO1.1@57.6,59.181 C27.2@57.6,61.3
  other v1: 34.81,31.5 34.81,35.4 78.19,69.6 78.19,73.5
GND: C1.1 C2.1 C3.1 C4.1 C5.1 C7.1 C8.1 C9.1 C10.1 C11.1 C12.1 C13.1 C14.1 C15.1 C16.1 C17.1 C18.1 C19.1 C20.1 C21.1 C22.1 C23.1 C24.1 C25.1 C26.1 C27.1 C28.1 C29.1 C30.1 C31.1 C32.1 C33.1 C34.1 C35.1 C36.2 C37.1 C38.1 CAN1.2 CAN1.8 D1.3 D1.8 D1.9 D2.2 D2.4 D2.6 D2.7 D3.A1 D3.C5 D3.E1 D3.E3 D4.6 D4.7 D.6 D.S1 D.S2 HL3.2 LDO1.2 LDO2.2 P.6 R14.1 R17.2 R25.2 R34.1 R36.2 R37.2 R47.2 R48.2 R49.2 R50.2 R51.2 R52.2 R53.2 R54.2 TYPE-C.A1_B12 TYPE-C.B1_A12 U1.4 U2.6 U2.7 U3.9 U3.11 U4.16 U4.38 U4.51 U4.61 U4.83 U4.94 U4.107 U4.120 U4.130 XP1_1.37 XP1_1.38 XP1_1.39 XP1_1.40 XP1_2.37 XP1_2.38 XP1_2.39 XP1_2.40 XP2_1.1 XP2_1.2 XP2_1.3 XP2_1.4 XP2_1.5 XP2_1.6 XP2_1.37 XP2_1.38 XP2_1.39 XP2_1.40 XP2_2.1 XP2_2.2 XP2_2.3 XP2_2.4 XP2_2.5 XP2_2.6 XP2_2.37 XP2_2.38 XP2_2.39 XP2_2.40 XP3_1.1 XP3_1.2 XP3_1.3 XP3_1.4 XP3_1.35 XP3_1.36 XP3_1.37 XP3_1.38 XP3_1.39 XP3_1.40 XP3_2.1 XP3_2.2 XP3_2.3 XP3_2.4 XP3_2.35 XP3_2.36 XP3_2.37 XP3_2.38 XP3_2.39 XP3_2.40 XP4_1.1 XP4_1.2 XP4_1.3 XP4_1.4 XP4_2.1 XP4_2.2 XP4_2.3 XP4_2.4
  other v1: 53.86,31.5 55.13,31.5 57.87,31.5 59.14,31.5 79.46,31.5 80.73,31.5 82,31.5 54,35.4 55.13,35.4 57.87,35.4 59.14,35.4 79.46,35.4 80.73,35.4 82,35.4 31,69.6 32.27,69.6 52.59,69.6 53.86,69.6 55.13,69.6 57.87,69.6 59.14,69.6 31,73.5 32.27,73.5 52.59,73.5 53.86,73.5 55.13,73.5 57.87,73.5 59.14,73.5
NetC1_2: C1.2 CAN1.5 R1.2 R2.2 | length 6.9
  Top Layer w0.15: CAN1.5@64.064,37.995 64.788,37.995 66.018,39.225 R2.2@66.8,39.225 68.575,39.225 R1.2@68.6,39.2 70.35,39.2 C1.2@70.4,39.25
NetC5_2: C5.2 U3.10 | length 6.1
  Top Layer w0.15: C5.2@73.55,58.3 74.325,58.3 74.5,58.125 74.5,55.283 74.55,55.233 74.55,54.175 75.025,53.7 U3.10@75.45,53.7
NetC6_1: C6.1 U3.12 | length 19
  Top Layer w0.15: U3.12@75.45,54.7 75.45,55.132 75.575,55.257 75.575,55.458 76.204,56.087 76.204,57.621 76.2,57.625 76.2,60.15 76.6,60.55 79.075,60.55 79.6,60.025 79.6,55.632 79.687,55.545 79.687,54.928 79.425,54.666 79.425,53.566 79.769,53.221 79.769,52.786 78.95,51.967 C6.1@78.95,51.2
NetC6_2: C6.2 U3.8 | length 2.1
  Top Layer w0.15: U3.8@75.925,52.725 76,52.65 76,52.45 76.775,51.675 76.775,51.625 77.2,51.2 C6.2@77.25,51.2
NetC7_2: C7.2 U4.24 Y1.2 | length 5.7
  Top Layer w0.15: Y1.2@54.75,40.7 Y1.2@55.28,41.23 ; U4.24@55.28,44.28 Y1.2@55.28,41.23 ; C7.2@56.9,41.8 56.475,41.375 55.425,41.375 Y1.2@55.28,41.23
NetC8_2: C8.2 U4.23 Y1.1 | length 9.1
  Top Layer w0.15: C8.2@48.3,41.8 49.575,41.8 50.45,40.925 Y1.1@50.45,40.7 52.167,40.7 54.78,43.313 U4.23@54.78,44.28
NetC26_2: C26.2 R18.2 U4.32 | length 4
  Top Layer w0.15: v1(59.225,43) 59.252,43.027 59.252,44.253 U4.32@59.28,44.28
  Bottom Layer w0.15: C26.2@57.8,41.9 57.85,41.95 R18.2@59.4,41.95 59.225,42.125 v1(59.225,43)
NetC34_2: C34.2 D4.5 R42.1 | length 21.1
  Bottom Layer w0.15: C34.2@70.15,56.7 69.725,56.275 69.608,56.275 69.223,55.89 69.223,55.646 68.838,55.261 68.838,53.202 69.05,52.99 69.05,52.468 69.125,52.393 69.125,46.975 69.225,46.875 71.4,46.875 71.825,47.3 71.825,48.621 72.663,49.459 72.663,51.645 72.942,51.925 74.145,51.925 74.888,52.667 74.888,52.7 75.062,52.875 D4.5@75.062,52.987
NetC35_2: C35.2 D4.8 | length 4.3
  Bottom Layer w0.15: C35.2@70.05,51.2 70.475,51.625 71.217,51.625 71.242,51.65 72.06,51.65 72.936,52.526 72.936,52.799 73.288,53.15 D4.8@73.4,53.15
NetCAN1_1: CAN1.1 U4.74 | length 31.6
  Top Layer w0.15: CAN1.1@59.136,41.805 59.86,41.805 60.503,42.448 61.927,42.448 62.303,42.825 62.303,43.26 62.216,43.347 61.665,43.898 61.665,45.484 60.043,47.106 60.043,50.855 60.773,51.585 60.773,51.987 60.685,52.075 59.7,52.075 58.3,53.475 58.3,55.287 58.388,55.375 60.692,55.375 60.78,55.463 U4.74@60.78,65.62
NetCAN1_4: CAN1.4 U4.73 | length 35
  Top Layer w0.15: CAN1.4@59.136,37.995 59.86,37.995 62.516,40.651 62.516,42.221 62.603,42.309 62.603,43.384 62.516,43.472 61.965,44.022 61.965,45.608 60.343,47.23 60.343,50.671 61.53,51.858 61.53,51.982 61.137,52.375 59.883,52.375 58.775,53.483 58.775,54.687 58.863,54.775 60.516,54.775 60.891,55.15 61.28,55.15 U4.73@61.28,65.62
NetCAN1_6: CAN1.6 R2.1 XP2_1.26 XP2_2.26 | length 13.2
  Top Layer w0.15: CAN1.6@64.064,39.265 64.064,38.773 63.849,38.559 63.088,38.559 62.873,38.345 62.873,37.645 62.99,37.528 66.797,37.528 R2.1@66.8,37.525 67.225,37.1 67.225,36.146 67.285,36.086 67.285,31.685 67.15,31.55 66.81,31.55 v1(66.76,31.5)
NetCAN1_7: CAN1.7 R1.1 XP2_1.24 XP2_2.24 | length 17.9
  Top Layer w0.15: CAN1.7@64.064,40.535 64.255,40.343 65.939,40.343 65.983,40.3 70.683,40.3 71.1,39.883 71.1,38.617 70.783,38.3 69.35,38.3 68.6,37.55 R1.1@68.6,37.5 68.6,32.845 68.03,32.275 v1(68.03,31.5)
  Top Layer w0.254: R1.1@68.973,37.077 R1.1@69.023,37.077
NetD1_2: D1.2 R8.2 | length 11.2
  Top Layer w0.15: R8.2@74.35,37.3 74.775,36.875 75.692,36.875 75.867,36.7 81.862,36.7 81.95,36.788 81.95,38.462 81.862,38.55 80.465,38.55 D1.2@80.415,38.6
NetD1_4: D1.4 R9.2 | length 6.2
  Top Layer w0.15: R9.2@74.35,38.9 74.4,38.9 75.45,39.95 77.385,39.95 77.435,39.9 79.004,39.9 79.55,39.354 79.55,39.215 D1.4@79.65,39.115
NetD1_5: D1.5 R10.2 | length 8.5
  Top Layer w0.15: R10.2@74.35,40.5 74.3,40.5 73.875,40.075 73.875,39.758 73.6,39.483 73.6,38.317 73.717,38.2 75.767,38.2 76.017,38.45 76.983,38.45 77.648,39.115 D1.5@79.15,39.115
NetD1_6: D1.6 U4.49
NetD1_7: D1.7 U4.125 | length 66.4
  Top Layer w0.15: v1(37.825,54.846) 37.946,54.846 38.8,55.7 U4.125@41.86,55.7 ; v1(78.175,38.1) D1.7@78.885,38.1
  Layer 2 w0.15: v1(37.825,54.846) 37.825,50.987 38.3,50.512 38.3,45.908 34.55,42.158 34.55,39.583 36.033,38.1 v1(78.175,38.1)
NetD2_1: D2.1 U4.92 | length 44.3
  Top Layer w0.15: U4.92@51.78,65.62 51.78,61.745 56.975,56.55 56.975,53.607 v1(58.945,51.636) ; D2.1@70.475,55.115 70.475,55.692 70.9,56.117 70.9,57.478 70.675,57.703 v1(70.675,57.825)
  Layer 1 w0.15: v1(58.945,51.636) 57.775,52.807 57.775,57.032 59.468,58.725 67.067,58.725 67.809,57.984 67.809,55.923 68.311,55.421 69.412,55.421 69.608,55.225 70.042,55.225 70.675,55.858 v1(70.675,57.825)
NetD2_5: D2.5 U4.50
NetD2_8: D2.8 R11.2 | length 30.9
  Top Layer w0.15: D2.8@73.89,53.95 73.89,55.315 74.075,55.5 74.075,55.925 74.15,56
  Layer 2 w0.15: v1(66.85,50.2) 67.621,50.971 67.621,51.84 68.307,52.525 68.993,52.525 69.125,52.393 69.125,46.788 69.213,46.7 73.95,46.7 74.15,46.9 74.15,50.783 74.725,51.358 74.725,53.019 75.575,53.869 75.575,59.275 v1(74.675,60.175)
NetD2_9: D2.9 R13.2 | length 8.9
  Layer 2 w0.15: v1(66.9,56.716) 66.9,55.983 68.233,54.65 71.174,54.65 72.399,53.425 72.627,53.425 v1(73.6,52.45) v1(73.6,52.45)
NetD2_10: D2.10 D2.15 R12.1 | length 57
  Top Layer w0.15: v1(65.9,66.25) 65.9,64.217 66.375,63.742 66.375,63.425 66.8,63 R12.1@66.85,63 ; D2.15@70.475,52.785 70.435,52.825 69.929,52.825 69.879,52.875 69.433,52.875 69.125,52.567 69.125,49.775 70.85,48.05 74.425,48.05 74.513,48.138 74.513,49.004 74.5,49.017 74.5,51.8 74.625,51.925 ; D2.10@72.975,52.785 73.045,52.715 73.045,52.263 73.383,51.925 74.625,51.925 ; v1(76.25,51.45) 76.25,51.533 75.858,51.925 74.625,51.925
  Layer 2 w0.15: v1(65.9,66.25) 66.325,66.675 67.834,66.675 67.934,66.775 79.317,66.775 79.717,67.175 81.223,67.175 81.75,66.648 81.75,55.401 80.657,54.308 79.583,54.308 79.561,54.286 78.911,54.286 76.775,52.15 76.775,51.975 v1(76.25,51.45)
NetD2_12: D2.12 U4.91 | length 37.4
  Top Layer w0.15: U4.91@52.28,65.62 52.28,61.87 57.375,56.775 57.375,53.976 59.576,51.775 59.649,51.775 59.874,51.55 v1(59.995,51.55) ; D2.12@71.975,52.785 72.075,52.685 72.075,52.432 72.307,52.2 72.507,52.2 72.8,51.907 72.8,50.493 72.177,49.87 v1(72.071,49.87)
  Layer 1 w0.15: v1(59.995,51.55) 61.433,51.55 61.658,51.775 65.967,51.775 67.392,53.2 68.725,53.2 69.041,52.884 69.859,52.884 70.8,51.942 70.8,49.733 70.995,49.537 70.995,49.204 71.138,49.061 71.262,49.061 v1(72.071,49.87)
NetD2_13: D2.13 U4.90 | length 32.6
  Top Layer w0.15: U4.90@52.78,65.62 52.78,61.945 58.75,55.975 v1@59.675,55.975 ; v1(71.325,49.95) 71.77,50.395 72.278,50.395 72.5,50.617 72.5,51.783 72.383,51.9 71.833,51.9 71.475,52.258 D2.13@71.475,52.785
  Layer 1 w0.15: v1(59.679,55.94) 61.409,54.211 68.457,54.211 69.484,53.184 69.983,53.184 71.325,51.842 v1(71.325,49.95)
NetD2_14: D2.14 U4.53 | length 24.9
  Top Layer w0.15: v1(60.1,52.9) 59.306,53.694 59.306,54.362 59.394,54.45 62.313,54.45 62.403,54.36 62.452,54.36 62.54,54.272 62.54,54.265 62.605,54.2 U4.53@63.2,54.2 ; v1(70.47,49.32) 70.439,49.351 70.439,50.089 70.975,50.625 D2.14@70.975,52.785
  Layer 2 w0.15: v1(60.1,52.9) 60.125,52.875 65.75,52.875 66.075,53.2 66.075,53.212 66.325,53.462 66.325,53.617 66.633,53.925 69.708,53.925 70.775,52.858 70.775,50.425 70.439,50.089 70.439,49.351 v1(70.47,49.32)
NetD2_16: D2.16 U4.93 | length 40
  Top Layer w0.15: U4.93@51.28,65.62 51.28,61.595 56.6,56.275 56.6,53.35 58.074,51.876 58.074,51.715 v1(59.407,50.382) ; D2.16@70.06,53.95 70.149,54.039 70.589,54.039 v1(70.675,54.125)
  Layer 1 w0.15: v1(59.407,50.382) 59.47,50.445 59.47,52.172 58.075,53.567 58.075,56.041 59.352,57.318 65.556,57.318 68.053,54.821 69.043,54.821 69.672,54.192 70.608,54.192 v1(70.675,54.125)
NetD3_A3: D3.A3 R22.2
  other v1: 66.85,51.8
NetD3_A5: D3.A5 U4.55
NetD3_B4: D3.B4 R23.2
NetD3_C1: D3.C1 R24.1
  other v1: 66.85,59.8
NetD3_D2: D3.D2 U4.89 | length 35.7
  Top Layer w0.15: U4.89@53.28,65.62 53.28,62.145 58.625,56.8 v1@59.575,56.8
  Layer 1 w0.15: v1(59.57,56.793) 61.842,54.521 68.571,54.521 69.2,53.892 69.699,53.892 70.616,52.975 74.521,52.975 74.645,52.85 78.264,52.85 78.943,53.529 79.027,53.529 79.281,53.783 v1(79.95,53.783)
  Bottom Layer w0.15: D3.D2@78.683,53.783 v1(79.95,53.783)
NetD4_1: D4.1 R41.2 | length 35.5
  Layer 2 w0.15: v1(66.875,61.425) 66.9,61.425 67.75,62.275 67.75,65.742 68.183,66.175 79.565,66.175 79.965,66.575 80.974,66.575 81.15,66.399 81.15,55.649 80.612,55.111 v1(78.696,55.111)
  Bottom Layer w0.15: D4.1@75.725,54.65 77.319,54.65 78.219,55.55 78.343,55.55 78.696,55.197 v1(78.696,55.111)
NetD4_4: D4.4 U4.88 | length 31.2
  Top Layer w0.15: U4.88@53.78,65.62 53.78,62.245 58.4,57.625 58.689,57.625 58.82,57.756 58.859,57.756 58.934,57.831 59.447,57.831 v1(59.459,57.843)
  Layer 1 w0.15: v1(59.459,57.843) 59.545,57.757 59.924,57.757 60.059,57.622 66.737,57.622 67.462,56.897 67.462,55.846 68.187,55.121 69.287,55.121 69.483,54.925 74.837,54.925 v1(76.387,53.375)
  Bottom Layer w0.15: D4.4@75.725,53.15 75.775,53.2 76.09,53.2 76.265,53.375 v1(76.387,53.375)
NetD4_9: D4.9 U4.132 | length 50.2
  Top Layer w0.15: U4.132@41.86,52.2 43.108,52.2 43.786,52.878 43.786,53.086 v1(44.55,53.85)
  Layer 2 w0.15: v1(44.55,53.85) 43.575,52.875 43.575,50.458 44.242,49.792 60.034,49.792 60.092,49.85 64.042,49.85 67.067,52.875 69.867,52.875 70.175,52.567 70.175,51.038 69.645,50.508 69.645,47.555 v1(69.8,47.4)
  Bottom Layer w0.15: v1(69.8,47.4) 69.8,49.975 69.425,50.35 69.425,51.65 69.6,51.825 69.867,51.825 69.992,51.95 71.442,51.95 72.967,53.475 73.113,53.475 73.288,53.65 D4.9@73.4,53.65
NetD4_12: D4.12 R38.1 U4.22 | length 4.3
  Bottom Layer w0.15: R38.1@73.55,58.3 73.713,58.137 74.325,58.137 74.325,56.142 74.062,55.88 D4.12@74.062,54.812
NetD4_13: D4.13 R39.2 | length 41.8
  Layer 1 w0.15: v1(66.85,47) 67.621,47.771 67.621,51.84 68.307,52.525 68.993,52.525 69.125,52.393 69.125,49.075 70.5,47.7 77.625,47.7 79.4,49.475 79.4,52.076 80.082,52.759 80.093,52.759 80.775,53.441 80.775,54.125 80.292,54.608 79.396,54.608 79.374,54.586 78.479,54.586 78.171,54.894 78.171,58.01 v1(78.824,58.662)
  Bottom Layer w0.15: D4.13@74.563,54.812 74.513,54.862 74.513,55.193 74.448,55.258 74.448,55.692 74.756,56 77.783,56 78.1,56.317 78.1,58.25 78.281,58.431 78.471,58.431 78.702,58.662 v1(78.824,58.662)
NetD4_14: D4.14 R40.2 | length 18.4
  Layer 2 w0.15: v1(66.85,53.4) 69.767,53.4 70.475,52.692 70.475,50.914 69.945,50.384 69.945,49.103 70.253,48.795 71.738,48.795 74.425,51.482 74.425,53.143 74.973,53.692 74.973,55.398 v1(75.05,55.475)
  Bottom Layer w0.15: v1(75.05,55.475) 75.056,55.469 75.056,54.819 D4.14@75.062,54.812
NetD_1: D.1 R31.2 U4.101 | length 47.8
  Top Layer w0.15: R31.2@41.6,39.35 41.6,41.571 41.125,42.046 41.125,42.86 46.425,48.16 46.425,53.467 v1(46.417,53.474) ; U4.101@47.28,65.62 47.29,65.63 47.29,67.04 v1(47.3,67.05)
  Bottom Layer w0.15: D.1@43.125,50.25 43.125,50.892 39.95,54.067 39.95,54.658 40,54.708 40,56.687 40.163,56.85 41.45,56.85 ; v1(46.417,53.474) 46.393,53.474 45.492,54.375 42.083,54.375 41.5,54.958 41.5,56.213 41.45,56.263 41.45,56.85 ; v1(47.3,67.05) 44.305,64.055 44.305,61.538 44.325,61.518 44.325,59.001 42.174,56.85 41.45,56.85
NetD_2: D.2 R32.2 | length 15.3
  Top Layer w0.15: R32.2@39.98,39.334 39.98,42.139 45.9,48.059 v1(45.9,49.2)
  Bottom Layer w0.15: D.2@43.125,49.15 43.4,49.425 45.554,49.425 45.778,49.2 v1(45.9,49.2)
NetD_3: D.3 U4.42
NetD_5: D.5 U4.48
NetD_7: D.7 R29.2 U4.98 | length 37.5
  Top Layer w0.15: v1(42.607,43.35) 44.8,41.157 R29.2@44.8,39.35 ; U4.98@48.78,65.62 48.802,65.642 48.802,67.127 v1(48.825,67.15)
  Bottom Layer w0.15: v1(42.607,43.35) 42.907,43.65 44.15,43.65 44.425,43.375 44.425,42.533 44.733,42.225 46.167,42.225 46.9,42.958 46.9,49.579 46.85,49.629 46.85,53.098 46.942,53.191 46.942,60.209 47.65,60.917 47.65,63.383 47.45,63.583 47.45,65.775 v1(48.825,67.15)
NetD_8: D.8 R30.2 U4.100 | length 34.5
  Top Layer w0.15: v1@41.75,42.45 43.2,41 R30.2@43.2,39.35 ; U4.100@47.78,65.62 47.78,64.542 47.976,64.345 v1(47.976,64.225)
  Bottom Layer w0.15: v1(41.7,42.475) 43.05,42.475 D.8@43.125,42.55 43.575,42.55 44.2,41.925 46.292,41.925 47.2,42.833 47.2,49.703 47.15,49.753 47.15,51.992 47.242,52.085 47.242,60.085 49.35,62.192 49.35,63.383 49.008,63.725 48.475,63.725 v1(47.976,64.225) v1(47.976,64.225)
NetHL1_1: HL1.1 R26.1 | length 1.8
  Top Layer w0.15: R26.1@82.1,59.6 HL1.1@82.1,61.4
NetHL1_2: HL1.2 U4.8 | length 2.5
  Top Layer w0.15: HL1.2@82.1,63.6 82.1,65.426 82.474,65.8 v1(82.575,65.8)
NetHL2_1: HL2.1 R27.1 | length 1.9
  Top Layer w0.15: R27.1@82.1,44.5 HL2.1@82.1,46.4
NetHL2_2: HL2.2 U4.9
NetHL3_1: HL3.1 R33.1 | length 4.1
  Top Layer w0.15: R33.1@82.1,50.4 82.1,50.45 82.525,50.875 82.575,50.875 82.8,51.1 82.8,53.2 HL3.1@82.1,53.9
NetP_2: P.2 R19.1 | length 3.3
  Top Layer w0.15: P.2@34.5,48.5 34.612,48.612 35.437,48.612 35.975,49.15 35.975,50.075 R19.1@36.4,50.5
NetP_3: P.3 R20.1 U4.110 XP1_1.31 XP1_2.31 | length 67.4
  Top Layer w0.15: R20.1@38,50.5 37.575,50.075 37.575,49.925 34.9,47.25 P.3@34.5,47.25 33.338,47.25 33.25,47.162 33.25,45.215 ; U4.110@41.86,63.2 44.517,63.2 46.45,61.267 46.45,54.825 45.592,53.967 45.592,50.059 45.483,49.95 45.163,49.95 45.075,49.862 45.075,48.083 42.842,45.85 42.04,45.85 41.94,45.75 38.567,45.75 38.467,45.85 35.833,45.85 35.383,45.4 33.435,45.4 33.25,45.215 ; v1(50.05,31.5) 50.05,32.275 48.794,33.531 43.369,33.531 42.7,34.2 42.122,34.2 41.795,34.527 41.795,36.273 41.468,36.6 40.3,36.6 40.016,36.884 39.397,36.884 39.28,37.001 39.28,37.703 38.683,38.3 37.717,38.3 37.4,38.617 37.4,39.5 37.157,39.743 37.157,41.076 35.383,42.85 33.667,42.85 33.25,43.267 33.25,45.215